# EAGLE board power mux (EAGLE 6.5.0)
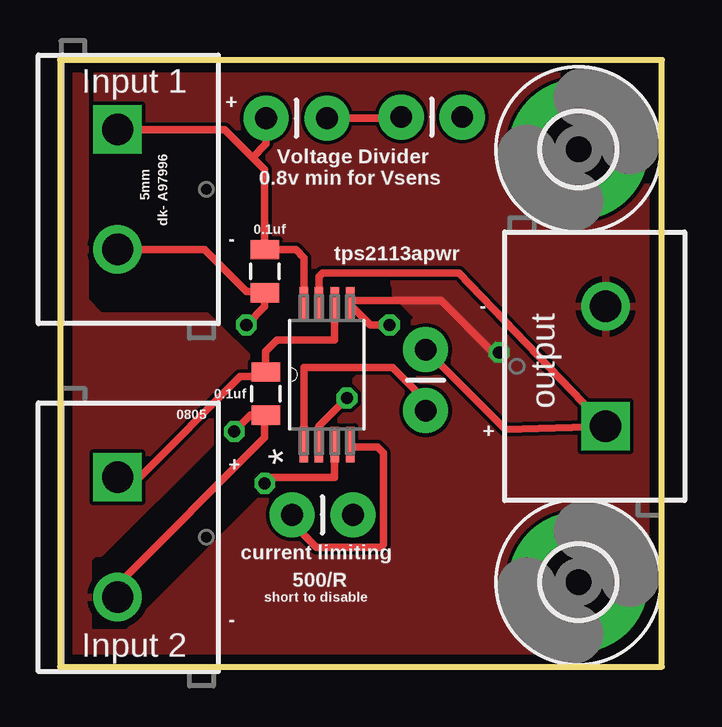
[diagram p0: board, top side]
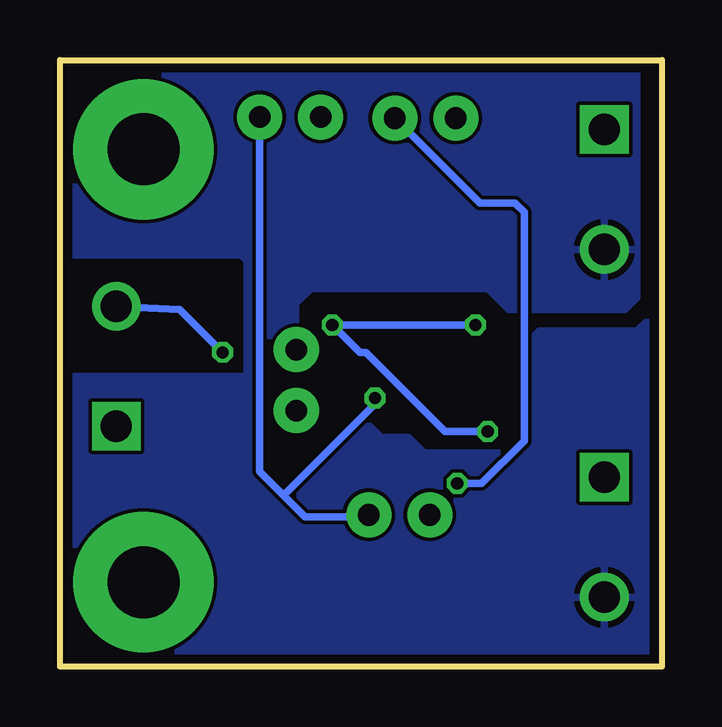
[diagram p1: board, bottom side, seen from below]

Size 25.1 x 25.3 mm. Coordinates in mm from the lower left corner, seen from the top.
Outline: 0,0 25.1,0 25.1,25.3 0,25.3 0,0
Copper layers (1*16): Top 0.0356mm / dielectric 1.5011mm / Bottom 0.0356mm
Design rules "LaenPCBOrder": minimum track width 6mil, minimum drill 13mil, track to track 6mil, track to pad 6mil, pad to pad 6mil, via to via 6mil, smd to smd 6mil, copper to edge 15mil, drill to drill 6mil, minimum pad ring 7mil, minimum via ring 7mil, stop-mask expansion 3mil, vias tented up to drill 0mil, thermal gap 10mil

## Footprints (pad centres in the part's own frame; a part is rotated, then mirrored left to right if it is on the bottom)
0805 = smd 0.8 x 1.2: 1 -0.9,0; 2 0.9,0
3,0-PAD = drill 3 pad 5.842: B3,0 0,0
SCREWTERMINAL-5MM-2 = drill 1.3 pad 2.032 square: 1 0,0 | drill 1.3 pad 2.032: 2 5,0
AXIAL-0.1 = drill 0.9 pad 1.88: P$1 0,0; P$2 2.54,0
SOP65P640X120-8N = smd 1.473 x 0.356: 1 -2.921,0.965; 2 -2.921,0.33; 3 -2.921,-0.33; 4 -2.921,-0.965; 5 2.921,-0.965; 6 2.921,-0.33; 7 2.921,0.33; 8 2.921,0.965

## Placement (x,y rotation side)
C1  [0805]  8.54,16.49 270 top
C2  [0805]  8.58,11.39 270 top
H1  MOUNT-PAD-ROUND3.0  [3,0-PAD]  21.62,3.53 0 top
H2  MOUNT-PAD-ROUND3.0  [3,0-PAD]  21.62,21.57 0 top
JP1  M025MM  [SCREWTERMINAL-5MM-2]  22.75,10.03 90 top
JP2  M025MM  [SCREWTERMINAL-5MM-2]  2.4,22.4 270 top
JP4  M025MM  [SCREWTERMINAL-5MM-2]  2.4,7.9 270 top
R1  [AXIAL-0.1]  11.13,22.87 180 top
R2  [AXIAL-0.1]  16.77,22.92 180 top
R3  [AXIAL-0.1]  12.22,6.33 180 top
R4  [AXIAL-0.1]  15.25,13.22 270 top
U1  TPS2113APWR  [SOP65P640X120-8N]  11.13,12.18 90 top

## Library data of the parts
C1 C2 = SparkFun-Capacitors
H1 H2 = holes
JP1 JP2 JP4 = SparkFun-Connectors
R1-R4 = SparkFun-Resistors
U1 = Texas Instruments_By_element14_Batch_1; MPN: TPS2113APWR; OC_FARNELL: 1757288; OC_NEWARK: 01J0961; PACKAGE: TSSOP-8; SUPPLIER: TEXAS INSTRUMENTS

## Nets
GND: C1.2 C2.2 JP1.2 JP2.2 JP4.2 U1.5
GND6: R2.P$1 R3.P$1 U1.2
ILIM: R3.P$2 U1.4
IN1+: C1.1 JP2.1 R1.P$2 U1.8
IN2+: C2.1 JP4.1 U1.6
N$8: R4.P$2 U1.1
OUT: JP1.1 R4.P$1 U1.7
VSENS: R1.P$1 R2.P$2 U1.3

## Tracks (layer width: path | path; a pad name or v marks a point on that pad's centre or on a via)
GND  (via drill 0.51)
  Top 0.305: JP2.2 6.02,17.4 7.77,15.65 8.48,15.65 | JP4.2 2.4,3.42 8.54,9.55 8.54,10.45 C2.2 7.95,10.49 v7.27,9.81 | v18.31,13.11 18.06,13.11 15.9,15.27 12.26,15.27 U1.5 12.95,14.25 v13.74,14.25 | C1.2 8.54,15.02 v7.77,14.25
  Bottom 0.305: JP1.2 20.11,14.9 v18.31,13.11 | v7.77,14.25 v13.74,14.25 12.6,13.11 12.35,13.11 9.04,9.81 v7.27,9.81
  pour Top: 0.03,25.3 0.03,-0.1 25.3,-0.1 25.3,25.17 25.17,25.3 1.68,25.3 1.55,25.17 1.55,19.2 1.93,18.82 7.14,18.82 9.55,16.41 13.49,16.41 14,15.9 14,15.52 14.89,14.63 14.89,14.51 9.43,9.04 9.43,8.03 2.82,1.42 1.3,1.42 1.17,1.55 1.17,4.47 1.42,4.73 1.68,4.73 6.25,9.3 6.25,10.7 6.38,10.82 6.76,10.82 7.65,11.71 8.66,11.71 9.43,12.47 8.28,12.47 6.12,14.63 1.68,14.63 1.04,15.27 1.04,24.41 0.15,25.3
  pour Bottom: -0.1,25.3 -0.1,-0.1 0.03,-0.23 25.3,-0.23 25.43,-0.1 25.43,11.33 24.66,12.09 17.3,12.09 17.3,16.92 17.55,17.17 25.05,17.17 25.3,16.92 25.3,25.3 1.04,25.3 1.04,15.39 1.55,14.89 6.38,14.89 7.27,15.78 14.63,15.78 15.27,15.14 15.27,13.11 11.71,9.55 10.57,9.55 9.93,8.92 5.62,8.92 5.36,9.17 5.36,13.74 5.11,14 1.04,14 0.54,14.51 0.54,24.79 0.03,25.3
GND6  (via drill 0.51)
  Top 0.305: U1.2 10.8,10.04 v11.96,11.2
  Bottom 0.305: R2.P$1 16.77,8.13 15.78,7.14 | 15.78,7.14 14.89,6.25 12.3,6.25 R3.P$1 | v11.96,11.2 11.96,10.95 15.78,7.14
ILIM
  Top 0.305: R3.P$2 9.68,6 10.7,4.98 13.36,4.98 13.49,5.11 13.49,8.92 13.24,9.17 12.18,9.17 U1.4
  Top 0.406: U1.4
IN1+
  Top 0.305: JP2.1 6.86,22.4 8.03,21.24 | 8.03,21.24 8.54,20.73 C1.1 9.84,17.39 10.19,17.04 10.19,15.12 U1.8 | R1.P$2 8.59,21.8 8.03,21.24
IN2+
  Top 0.305: JP4.1 3.33,7.9 7.52,12.09 8.38,12.09 C2.1 8.58,13.15 9.04,13.62 11.46,13.62 U1.6
N$8
  Top 0.305: U1.1 10.19,9.28 10.19,12.47 13.87,12.47 15.01,11.33 15.01,10.92 R4.P$2
OUT
  Top 0.305: R4.P$1 18.57,9.9 JP1.1 16.64,16.41 10.95,16.41 10.8,16.26 U1.7
VSENS  (via drill 0.51)
  Top 0.305: R1.P$1 14.18,22.87 R2.P$2 | v8.54,7.65 8.79,7.9 11.46,7.9 U1.3
  Bottom 0.305: v8.54,7.65 7.52,7.65 5.74,9.43 5.74,18.95 6.12,19.33 7.59,19.33 R1.P$1

## Text on the board
tPlace: Input 1 | + | Voltage Divider | 5mm | 0.8v min for Vsens | 0.1uf | dk- A97996 | - | tps2113apwr | - | 0.1uf | output | 0805 | + | + | current limiting | short to disable | 500/R | - | Input 2